# Altium PCB RF36V Beta.PcbDoc
Units mm, origin at the board's own origin, x right, y up, seen from the top; angles counter-clockwise.
Board outline 127.7 x 73.6 mm, 2 copper layers (Top Layer, Bottom Layer); 67 components, 52 nets, 206 pads, 59 vias.
Unrouted connection lines stored in the file: 6.
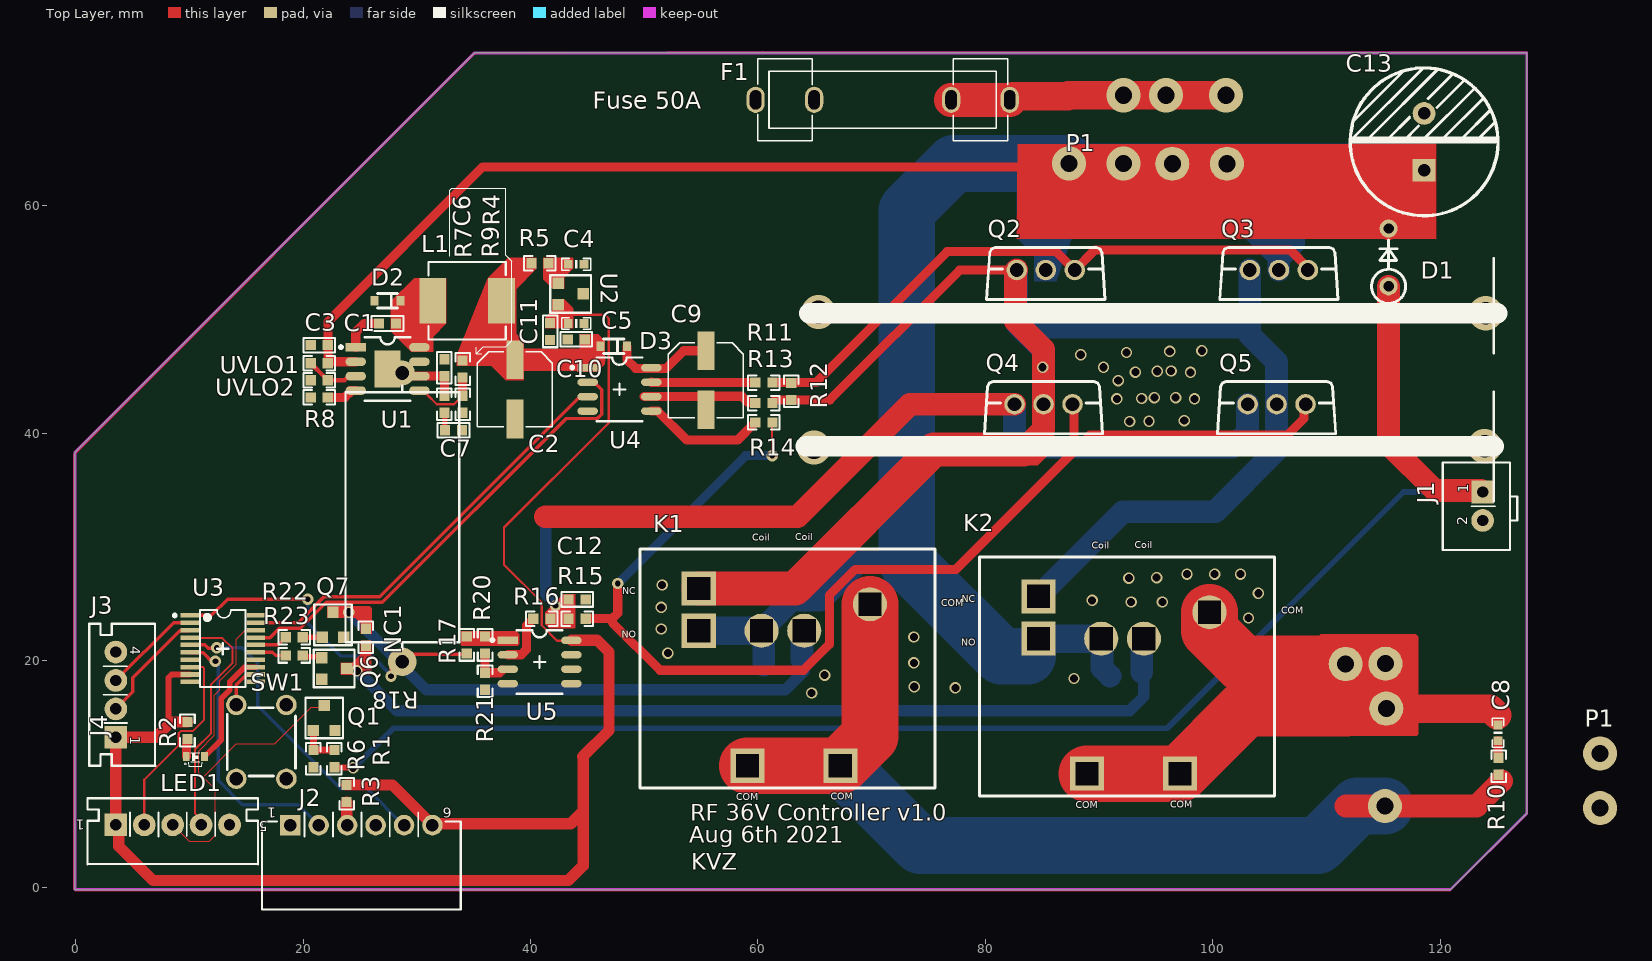
[diagram p0: Top Layer view]
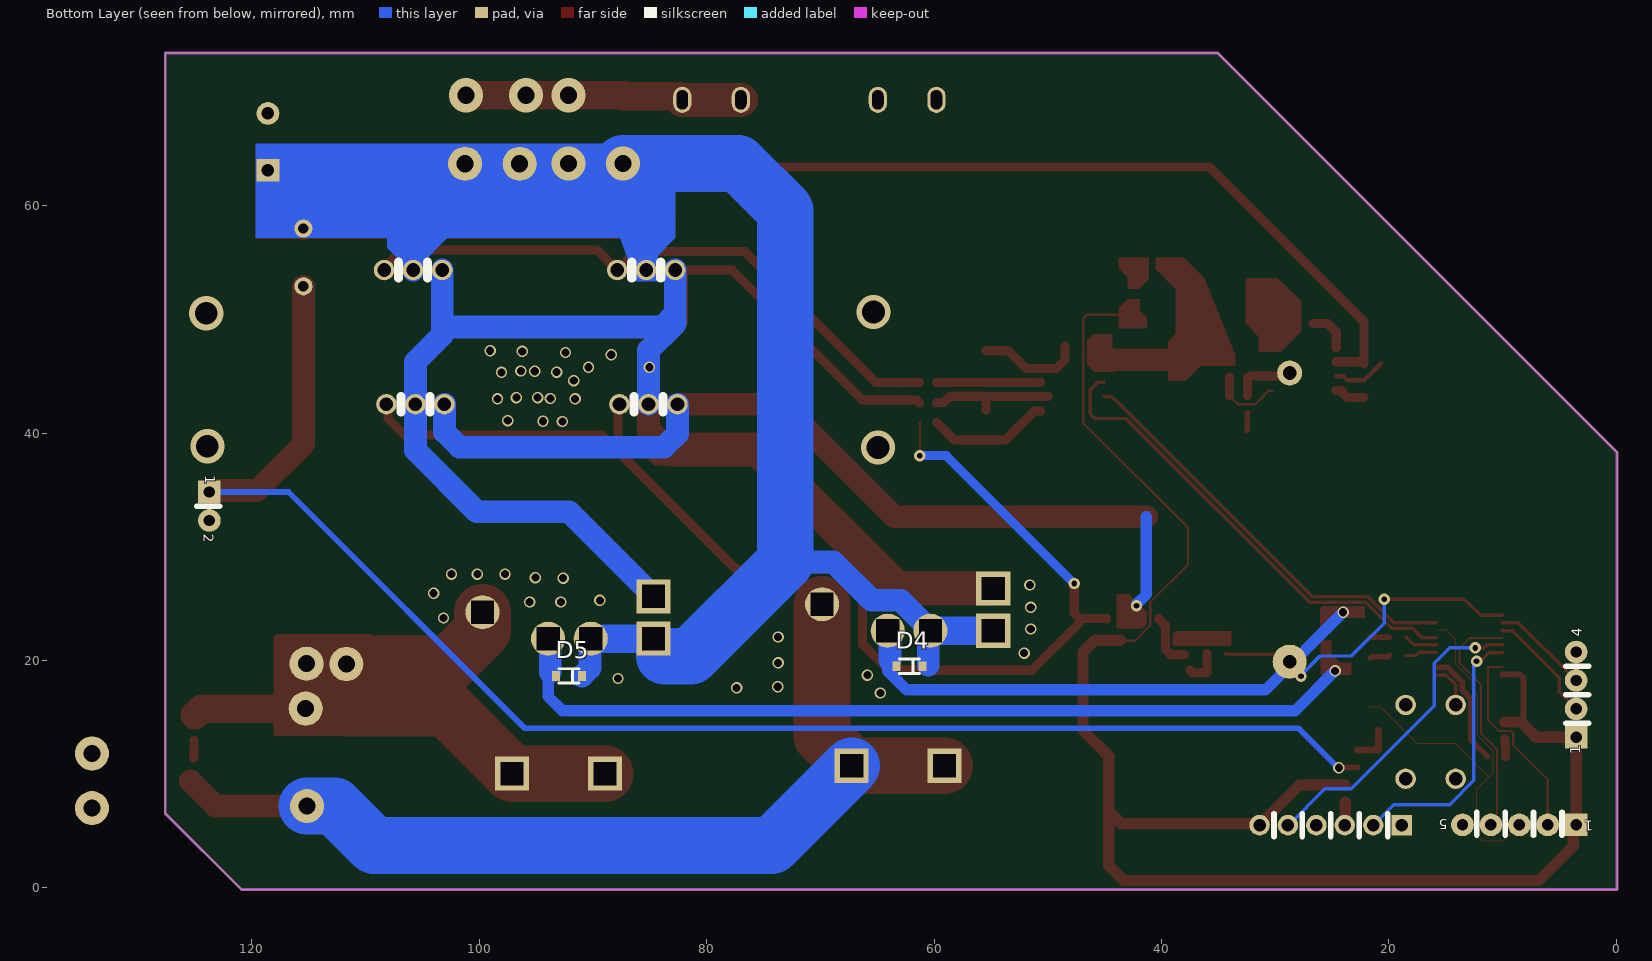
[diagram p1: Bottom Layer view, seen from below]

## Layer stack, top to bottom
Top Solder: solder mask 0.0102, Solder Resist, Dk 3.5
Top Layer: signal copper 0.0356
Dielectric 1: dielectric 0.32, FR-4, Dk 4.8
Bottom Layer: signal copper 0.0356
Bottom Solder: solder mask 0.0102, Solder Resist, Dk 3.5

## Board outline
-0.075,-0.15 120.925,-0.15 127.625,6.55 127.625,73.45 35.05,73.45 -0.075,38.325

## Design rules (kind name [scope] priority, off if disabled: settings)
Clearance [All] p1: gap=0.178 ignorepadtopadclearanceinfootprint=TRUE
PolygonConnect [All] p1: connectstyle=Direct reliefconductorwidth=0.254 reliefentries=4 polygonreliefangle="90 Angle" airgapwidth=0.254
RoutingVias [All] p1: holewidth=0.711 width=1.27 viastyle="Through Hole" minholewidth=0.711 minwidth=1.27 maxholewidth=0.711 maxwidth=1.27
SolderMaskExpansion [All] p1: expansion=0.102 istentingtop=FALSE
Width [All] p1: maxlimit=10 minlimit=0.1 preferedwidth=0.254
30 further rules are at their usual default settings.

## Classes and differential pairs
component class "Single motor monitoring Beta": C1 C2 C4 C6 C8 C10 C12 D1 D2 D4 D6 D7 J1 J2 J3 J4 K1 K2 L1 LED1 P2 Q1 Q2 Q3 Q4 Q5 Q6 Q7 R1 R2 R3 R4 R5 R6 R7 R8 R9 R10 R11 R13 R15 R17 R19 R20 R21 R22 R23 SW1 U1 U2 U3 U4 U5 UVLO1 UVLO2

## Components (designator, comment, footprint, x,y, rotation, side; value= is the part's Value field where it differs from the comment)
C1 "PXL456470-1530" CAPC0603-RW 27.425,49.65 r0 top value=0.1uF
C2 "PBE099540-1010" "CASE - D" 38.625,43.85 r90 top value=20uF
C3 "PXL456470-1530" CAPC0603-RW 21.425,47.75 r180 top value=4.7uF (schematic designator C4)
C4 "4.7uF" 0603P 44.025,54.85 r180 top (schematic designator C5)
C5 "4.7uF" 0603P 44.025,49.65 r180 top (schematic designator C6)
C6 "PXL456470-1530" CAPC0603-RW 32.425,45.75 r90 top value=68pF (schematic designator C7)
C7 "PXL456470-1530" CAPC0603-RW 33.225,40.25 r0 top value=6.8nF (schematic designator C8)
C8 "104" 0603P 125.1,13.65 r270 top (schematic designator C9)
C9 "PBE099540-1010" "CASE - D" 55.425,44.65 r90 top value=10uF (schematic designator C11)
C10 "PXL456470-1530" CAPC0603-RW 44.025,48.25 r180 top value=1uF
C11 "PXL456470-1530" CAPC0603-RW 41.725,48.95 r270 top value=4.7uF (schematic designator C12)
C12 "PXL456470-1530" CAPC0603-RW 44.1,25.375 r0 top value=102 (schematic designator C13)
C13 "PVE599570-4710" CAP_Radial_D13L25P5.0 118.6,65.625 r270 top value=1000uF (schematic designator C3)
D1 "RAD114004-0010" DO-41-V-P5.08 115.475,52.92 r90 top
D2 "42V 5A" SOD-323 27.425,51.65 r0 top
D3 "42V 5A" SOD-323 47.325,47.65 r0 top (schematic designator D4)
D4 "42V 5A" SOD-323 62.175,19.5 r180 bottom (schematic designator D6)
D5 "42V 5A" SOD-323 92.125,18.65 r180 bottom (schematic designator D7)
F1 "CFC021001-1001" "FUSE HOLDER BXSJ-01-01" 70.975,69.325 r180 top
J1 "T690300125300" "CONN 2P PH=2.5mm HAA250A-2 WHITE" 123.75,33.575 r90 top value=2.5mm
J2 "T690300121600" "CONN 6P PH=2.5mm RA XHB-6AW-KL" 25.125,5.525 r180 top value=2.5mm
J3 "CCN250000-0104" "CONN 4P PH=2.5mm B4B-XH-A" 3.525,17 r270 top value=2.5mm
J4 "CCN250000-0105" "CONN 5P PH=2.5mm B5B-XH-A" 8.525,5.55 r180 top locked value=2.5mm
K1 "SLB4119" "RELAY SLB4119" 56.025,12.55 r0 top
K2 "SLB4119" "RELAY SLB4119" 85.9,11.85 r0 top
L1 "T621000090500" "IND CSAB0740" 34.425,51.65 r0 top value=22uH
LED1 "T575013160258" "LED 0603 JH-CW52E12SMP001" 10.525,11.55 r180 top
NC1 "T501348102129" 0603-RW 25.525,22.05 r270 top
P1 "CJP012009-0050" "Motor&Bat connector" 132.9,8.975 r270 top (schematic designator P2)
P1 "CJP012009-0050" "Motor&Bat connector" 98.4,64.875 r180 top
Q1 "RCN000846-0001" SOT23-132-RW 21.85,14.95 r0 top
Q2 "RHM120060-1001" TO220-F 87.875,54.35 r180 top locked
Q3 "RHM120060-1001" TO220-F 108.375,54.35 r180 top locked
Q4 "RHM120060-1001" TO220-F 87.675,42.55 r180 top locked
Q5 "RHM120060-1001" TO220-F 108.175,42.55 r180 top locked
Q6 "RCN000846-0001" SOT23-132-RW 22.725,19.3 r270 top
Q7 "RCN000846-0001" SOT23-132-RW 22.625,23.15 r0 top
R1 "T501348102129" 0603-RW 22.75,11.375 r270 top value=22k
R2 "T501348102129" 0603-RW 9.825,13.85 r90 top value=1K
R3 "T501348102129" 0603-RW 23.825,8.3 r90 top value=101
R4 "T501348102129" 0603-RW 34.025,45.65 r270 top value=182K
R5 "T501348102129" 0603-RW 40.825,54.95 r0 top value=0ohm
R6 "T501348102129" 0603-RW 20.9,11.375 r90 top value=1k
R7 "T501348102129" 0603-RW 32.425,42.55 r270 top value=10.5K
R8 "T501348102129" 0603-RW 21.425,43.15 r0 top value=243K
R9 "T501348102129" 0603-RW 34.025,42.55 r270 top value=10.2K
R10 "T501348102129" 0603-RW 125.15,10.7 r90 top value=10R
R11 "T501348102129" 0603-RW 60.525,44.45 r0 top value=4.7R
R12 "T501348102129" 0603-RW 62.925,43.675 r90 top value=10K (schematic designator R13)
R13 "T501348102129" 0603-RW 60.525,42.65 r0 top value=4.7R (schematic designator R14)
R14 "T501348102129" 0603-RW 60.525,40.95 r0 top value=100R (schematic designator R15)
R15 "T501348102129" 0603-RW 44.1,23.675 r0 top value=10K (schematic designator R16)
R16 "T501348102129" 0603-RW 41,23.675 r0 top value=102 (schematic designator R17)
R17 "T501348102129" 0603-RW 34.4,21.375 r270 top value=1K (schematic designator R18)
R18 "QHE505000-5190" 5W-22X10-H 28.725,32.6 r90 top value=5mR (schematic designator R19)
R20 "T501348102129" 0603-RW 36,21.375 r90 top value=21K
R21 "T501348102129" 0603-RW 36,18.175 r90 top value=1K
R22 "T501348102129" 0603-RW 19.225,22.05 r0 top value=2.2k
R23 "T501348102129" 0603-RW 19.225,20.45 r0 top value=2.2k
SW1 "MSWA06012-0010" TS_6X6X8_DIP 16.325,12.85 r90 top value=TACT
U1 "TPS54540" SO8-EP 27.425,45.65 r0 top
U2 "7805" 2SC2712GR 43.525,52.25 r270 top
U3 "RCI800336-0001" TSSOP20 12.925,21.05 r270 top
U4 "T610900027257" SO8 47.825,43.85 r0 top
U5 "RCI000358-0001" SO8 40.8,19.875 r0 top
UVLO1 "T501348102129" 0603-RW 21.425,46.15 r0 top value=1.676M
UVLO2 "T501348102129" 0603-RW 21.425,44.65 r0 top value=60K

## Footprints (in the part's own frame and the unit in brackets; to place one, negate y for a bottom-side part, rotate by r counter-clockwise, add the part's x,y. Pads: shape width x height; smd on the part's side, far side on the other; paste and mask are expansions set on the pad)
2SC2712GR [mm] "SOT23 -231  (SC-59 SST3)"
  rect 1x1 smd: 1(0.95,-1.1) 2(-0.95,-1.1) 3(0,1.1)
  silkscreen extent -1.65,-1.79 1.65,1.79, body extent -1.46,-1.17 1.46,1.17, height 1
5W-22X10-H [mm] "Resistor,Axial,5W 25.4mm C X 1.2 W 22mm LX10mm"
  round 2.5 / inner round 2.2 / far side round 3 hole 1.2 mask+0.05: 1(-12.7,0)
  round 2.2 hole 1.2 mask+0.05: 2(12.7,0)
  silkscreen extent -11.58,-5 11.58,5, body extent -13.19,-4.8 13.21,4.9, height 9.71
0603-RW [mm]
  rect 0.9x0.9 smd mask+0.05: 1(-0.75,0) 2(0.75,0)
  silkscreen extent -1.39,-0.64 1.39,0.64, body extent -0.8,-0.41 0.8,0.39, height 0.3
0603P [mil]
  rect 30x30 smd: 1(-27,0) 2(27.5,-0.06)
  silkscreen extent -50,-20 50,20
CAP_Radial_D13L25P5.0 [mm] "Body: Dia. 14mm(Max,),Height:26.5mm(max),Pitch:5mm"
  rect 2x2 hole 1.1 mask+0.05: 1(2.5,0)
  round 2 hole 1.1 mask+0.05: 2(-2.5,0)
  silkscreen extent -6.5,-6.5 6.5,6.5, body extent -6.5,-6.49 6.5,6.49, height 25
CAPC0603-RW [mm] "Body size:  L1.6XW0.8XT0.8mm"
  rect 0.9x0.9 smd mask+0.05: 1(-0.75,0) 2(0.75,0)
  silkscreen extent -1.39,-0.64 1.39,0.64, body extent -0.8,-0.4 0.8,0.4, height 0.8
"CASE - D" [mm] "CHIP ELECT CAP D6.3mm * H5.4mm"
  rect 3.4x1.5 smd mask+0.05: 1(2.6,0) 2(-2.6,0)
  silkscreen extent -3.3,-3.3 3.3,3.3, body extent -3.5,-3.3 3.5,3.3, height 5.4
"CONN 2P PH=2.5mm HAA250A-2 WHITE" [mm] "CONN 2P PH=2.5mm HAA250A-2 WHITE"
  rect 2x2 hole 1: 1(1.25,0)
  round 2 hole 1: 2(-1.25,0)
  silkscreen extent -3.85,-3.05 3.85,3.5, body extent -3.75,-3.05 3.75,3.5, height 7.4
"CONN 4P PH=2.5mm B4B-XH-A" [mm] "CONN 4P PH=2.5mm B4B-XH-A H7mm"
  rect 2x2 hole 1: 1(3.75,0)
  round 2 hole 1: 2(1.25,0) 3(-1.25,0) 4(-3.75,0)
  silkscreen extent -6.25,-2.35 6.25,3.46, body extent -6.2,-2.3 6.2,3.45, height 7
"CONN 5P PH=2.5mm B5B-XH-A" [mm] "CONN 5P PH=2.5mm B5B-XH-A H7mm"
  rect 2x2 hole 1: 1(5,0)
  round 2 hole 1: 2(2.5,0) 3(0,0) 4(-2.5,0) 5(-5,0)
  silkscreen extent -7.5,-2.35 7.5,3.47, body extent -7.45,-2.35 7.45,3.4, height 7
"CONN 6P PH=2.5mm RA XHB-6AW-KL" [mm] "WAFER 6P XHB-6AW-KL"
  rect 1.8x1.8 hole 1.1: 1(6.25,0)
  round 1.8 hole 1.1: 2(3.75,0) 3(1.25,0) 4(-1.25,0) 5(-3.75,0) 6(-6.25,0)
  silkscreen extent -8.75,-1.11 8.75,7.43, body extent -8.75,-0.31 8.75,7.42, height 6.56
DO-41-V-P5.08 [mm]
  round 1.6 hole 0.91: 1(0,0) 2(5.08,0)
  silkscreen extent -1.5,-1.5 4.06,1.5, body extent -1.42,-1.4 5.53,1.4, height 7.45
"FUSE HOLDER BXSJ-01-01" [mm] "FUSE HOLDER 5*20MM BXSJ-01-01"
  oval 1.6x2.3 hole 1 slot 1.7 at 90 deg: 1(-11.175,0) 1(-6.025,0) 2(6.025,0) 2(11.175,0)
  silkscreen extent -11,-3.6 11,3.6, body extent -11.41,-3.88 11.39,3.83, height 11.42
"IND CSAB0740" [mm] "6.6mmX6.6mm H3.8mm"
  rect 2.35x4 smd: 1(-3.025,0) 2(3.025,0)
  silkscreen extent -3.4,-3.4 3.4,3.4, body extent -3.5,-3.4 3.5,3.4, height 3.8
"LED 0603 JH-CW52E12SMP001" [mm]
  rect 0.6x0.8 smd mask+0.03: 1(-0.8,0) 2(0.8,0)
  silkscreen extent -0.6,-0.35 0.97,0.85, body extent -0.8,-0.35 0.8,0.85, height 0.6
"Motor&Bat connector" [mm]
  round 3 hole 1.5: 1(-2.85,1.175) 2(1.95,1.175)
"RELAY SLB4119" [mm] "HFD23\012-1ZS"
  rect 3x3 hole 2 square mask+0.05: 1(-1.225,10.075) 2(-1.225,13.8) 6(11.225,-1.8) 7(3.05,-1.8)
  round 3 hole 2 square mask+0.05: 3(4.3,10.075) 4(8.05,10.075) 5(13.825,12.4)
  silkscreen extent -6.4,-3.75 19.55,17.25, body extent -6.43,-3.75 19.5,17.25, height 0.25
SO8 [mm] "SO8 8Pin Pitch 1.27mm Body 4.9mm X 3.9mm"
  rect 1.8x0.65 smd: 1(-2.8,1.905)
  oval 1.8x0.65 smd: 2(-2.8,0.635) 3(-2.8,-0.635) 4(-2.8,-1.905) 5(2.8,-1.905) 6(2.8,-0.635) 7(2.8,0.635) 8(2.8,1.905)
  silkscreen extent -4.25,-2.8 2,2.8, body extent -3,-2.45 3,2.45, height 1.75
SO8-EP [mm] "SO8 8Pin Exposed Pad, Pitch 1.27mm Body 4.9mm X 3.9mm"
  rect 2.3x3.25 smd: 0(0,0)
  rect 1.8x0.75 smd: 1(-2.8,1.905)
  oval 1.8x0.75 smd: 2(-2.8,0.635) 3(-2.8,-0.635) 4(-2.8,-1.905) 5(2.8,-1.905) 6(2.8,-0.635) 7(2.8,0.635) 8(2.8,1.905)
  silkscreen extent -4.2,-2.8 2,2.8, body extent -3,-2.45 3,2.45, height 1.75
SOD-323 [mm] "SMD Body W 1.4mm L 1.8mm"
  rect 0.7x0.85 smd: 1(-1.15,0) 2(1.15,0)
  silkscreen extent -0.89,-0.64 0.89,0.64, body extent -1.3,-0.67 1.3,0.68, height 1.1
SOT23-132-RW [mm]
  rect 1x1 smd: 1(-0.95,-1.1) 2(0.95,-1.1) 3(0,1.1)
  silkscreen extent -1.65,-1.79 1.65,1.79, body extent -1.46,-1.17 1.46,1.17, height 1
TO220-F [mm]
  round 1.8 hole 1.2: 1(0,0) 2(2.55,0) 3(5.1,0)
  silkscreen extent -2.65,-2 7.75,2.6, body extent -2.53,-1.76 7.63,3.04, height 21.3
TS_6X6X8_DIP [mm] "TACT Switch DIP Body  L6*W6*H8mm"
  round 1.8 hole 1.2 mask+0.05: 1(-3.25,2.2) 2(3.25,2.2) 3(-3.25,-2.2) 4(3.25,-2.2)
  silkscreen extent -3,-3 3,3, body extent -3.98,-3.1 3.94,3.1, height 8
TSSOP20 [mm] "TSSOP,Exposed Paddle,0.65mm,pitch;20 pin,4.60mm W X 6.6mm L X 1.20mm H body"
  rect 0.4x1.6 smd: 1(-2.925,-2.9) 2(-2.275,-2.9) 3(-1.625,-2.9) 4(-0.975,-2.9) 5(-0.325,-2.9) 6(0.325,-2.9) 7(0.975,-2.9) 8(1.625,-2.9) 9(2.275,-2.9) 10(2.925,-2.9) 11(2.925,2.9) 12(2.275,2.9) 13(1.625,2.9) 14(0.975,2.9) 15(0.325,2.9) 16(-0.325,2.9) 17(-0.975,2.9) 18(-1.625,2.9) 19(-2.275,2.9) 20(-2.925,2.9)
  silkscreen extent -3.4,-4.32 3.37,2, body extent -3.25,-3.2 3.25,3.2, height 1.1

## Part data
C1: library part "CAP0603 0.015uF 50V 10%", "GP CHIP CAP 0.015uF 50V 10% 0603 TYPE X7R", PACKAGE=CAPC0603, Tolerance=10%, Voltage=10V, Customer Specific=N/A, DIP&SMD=SMD, Other=X7R, SAP=T542021537508, Type=Capacitor, Vendor Code=10010262, Vendor Name=东莞市晴远电子有限公司
C2: library part "CAP E 100uF 16V 20% SMD", "CHIP ELECT 100uF 16V 20% SMD 6.3x5.4mm", PACKAGE="CASE - D", Tolerance=20%, Voltage=16V, Customer Specific=N/A, DIP&SMD=SMD, SAP=T551101434030, Type=Capacitor, Vendor Code=10020343, Vendor Name=深圳市春明电子有限公司
C3: library part "CAP0603 0.015uF 50V 10%", "GP CHIP CAP 0.015uF 50V 10% 0603 TYPE X7R", PACKAGE=CAPC0603, Tolerance=10%, Voltage=50V, Customer Specific=N/A, DIP&SMD=SMD, Other=X7R, SAP=T542021537508, Type=Capacitor, Vendor Code=10010262, Vendor Name=东莞市晴远电子有限公司
C4 C5 C8: library part C
C6 C7: library part "CAP0603 0.015uF 50V 10%", "GP CHIP CAP 0.015uF 50V 10% 0603 TYPE X7R", PACKAGE=CAPC0603, Tolerance=10%, Voltage=3V, Customer Specific=N/A, DIP&SMD=SMD, Other=X7R, SAP=T542021537508, Type=Capacitor, Vendor Code=10010262, Vendor Name=东莞市晴远电子有限公司
C9: library part "CAP E 100uF 16V 20% SMD", "CHIP ELECT 100uF 16V 20% SMD 6.3x5.4mm", PACKAGE="CASE - D", Tolerance=20%, Voltage=6V, Customer Specific=N/A, DIP&SMD=SMD, SAP=T551101434030, Type=Capacitor, Vendor Code=10020343, Vendor Name=深圳市春明电子有限公司
C10: library part "CAP0603 0.015uF 50V 10%", "GP CHIP CAP 0.015uF 50V 10% 0603 TYPE X7R", PACKAGE=CAPC0603, Tolerance=10%, Voltage=16V, Customer Specific=N/A, DIP&SMD=SMD, Other=X7R, SAP=T542021537508, Type=Capacitor, Vendor Code=10010262, Vendor Name=东莞市晴远电子有限公司
C11 C12: library part "CAP0603 0.015uF 50V 10%", "GP CHIP CAP 0.015uF 50V 10% 0603 TYPE X7R", PACKAGE=CAPC0603, Tolerance=10%, Voltage=6V, Customer Specific=N/A, DIP&SMD=SMD, Other=X7R, SAP=T542021537508, Type=Capacitor, Vendor Code=10010262, Vendor Name=东莞市晴远电子有限公司
C13: library part "CAP E Aluminum 470uF 50V 20% - PVE599570-4710", "COND ELECT 470uF 50V 20% 105 13x25mm", PACKAGE=470uF/50V, Tolerance=20%, Voltage=50V, Customer Specific=N/A, DIP&SMD=DIP, MFG=佳维诚, SAP=T552471464020, Type=Capacitor, Vendor Code=10020154, Vendor Name=惠州市佳维诚电子有限公司
D1: library part 1N4004S, "GP DIODE  1N4004 1A 280VRMS DO-41", Current=1A, PACKAGE=DO-41, Voltage=400V, Customer Specific=N/A, DIP&SMD=DIP, MFG=PANJIT, MFG Part=1N5401, SAP=T571002250423, Type=DIODE, Vendor Code=10020343, Vendor Name=深圳市春明电子有限公司
D2 D3 D4 D5: library part SD107WS, "Schottky Diodes , SOD-323", PACKAGE=SOD-323, CREATE_NAME=Nathan, CREATE_TIME=17-Nov-2020, Customer Specific=N/A, DIP&SMD=SMD, MFG="Micro Commercial Components", MFG Part=SD107WS, Type=DIODE
F1: library part "FUSE HOLDER BXSJ-01-01", "FUSE HOLDER 5*20MM BXSJ-01-01", CREATE_NAME=GordonL@Deftronics, CREATE_TIME=25-JAN-2013, DIP&SMD=DIP, MFG=亿山, MFG Part=50A, SAP=T690300023400, Type=Connector
J1: library part "CONN 2P PH=2.5mm HAA250A-2 BLACK", "CONNECTOR HA2.5 2PIN BLACK K", Current=3A, CREATE_NAME=Nathan, CREATE_TIME=24-Nov-2017, DIP&SMD=DIP, MFG=金瑞康, MFG Part="HAA250A-2 BLACK", SAP=T690300125300, Type=Connector
J2: library part "CONN PH 6P PH=2.5mm RA XHB-6AW-KL", "CONNECTOR 6PIN P=2.5 WHITE 90 K", CREATE_NAME=Nathan, CREATE_TIME=27-Sep-2017, DIP&SMD=DIP, MFG=金佳电子, MFG Part=XHB-6AW-KL, SAP=T690300121600, Type=Connector
J3: library part "CONN 4P PH=2.5mm B4B-XH-A", "GP CONNECTOR B4B-XH-A 4 PIN", Current=3A, DIP&SMD=DIP, SAP=T690300029000, Type=Connector, Vendor Code=10009989, Vendor Name=亿源电子有限公司
J4: library part "CONN 5P PH=2.5mm B5B-XH-A", "CONNECTOR B5B-XH-A 5 PIN", Current=3A, DIP&SMD=DIP, SAP=T690300029100, Type=Connector, Vendor Code=10020373, Vendor Name=深圳市利民丰电子有限公司
K1 K2: library part "Relay SLB4119 7P"
L1: library part "IND 22uH CSAB0740-220M", "22UH 4A 100K SMD CODACA CSAB074 K", Current=4A, Tolerance=20%, CREATE_NAME=Nathan, CREATE_TIME=30-Aug-2019, Customer Specific=N/A, DCR="125 mohm (max.)", DIP&SMD=SMD, MFG=CODACA, MFG Part=CSAB0740-220M, SAP=T621000090500, Type=INDUCTOR
LED1: library part "LED 0603 JH-CW52E12SMP001", "LED W WHI 0602 JH-CW52E12SM MINGSHOU L", Color=White, PACKAGE=0603, CREATE_NAME=Tom, DIP&SMD=SMD, MFG=MINGSHOU, MFG Part=JH-CW52E12SMP001, SAP=T575013160258, Type=LED
NC1: library part "RES0603 1/16W 0.1% 3.48K OHM", "CHIP 3.48K OHM 50PPM +-0.1% 0603 WALS L", Power="1/16 W", CREATE_NAME=Tom, CREATE_TIME=12-Apr-2016, Customer Specific=N/A, DIP&SMD=SMD, MFG=WALSIN, MFG Part=WF06T3481BTL, SAP=T501348102129, TOL=0.1%, Type=Resistor
P1 P1: library part "AC INLET 2P DB8-6S1 N-Polar", "AC SOCKET 2P D2.36 2.5A 250V VDE BLACK", Current=5A, DIP&SMD=DIP, MFG=金明浩, MFG Part="DB8-6S1 N-Polar", SAP=T690300011500, Type=Connector, Vendor Code=10010007, Vendor Name=深圳市金明浩电子科技有限公司
Q1 Q6 Q7: library part LBC846BLT1G, "NPN LRC BC846BLT1G SOT23", PACKAGE=SOT-23, Customer Specific=N/A, DIP&SMD=SMD, MFG=LRC, MFG Part=2N5551, SAP=T581003640437, Type=NPN, Vendor Code=10009129, Vendor Name="WING HING ENTERPRISE CO"
Q2 Q3 Q4 Q5: library part 12N60L-A-TF3-T, "MOSFET 3PIN 12N60L-A -TF3-T TO-220F", Current=12A, PACKAGE=TO220, Voltage=600V, Customer Specific=N/A, DIP&SMD=DIP, MFG=UTC, MFG Part=12N60L-A-TF3-T, SAP=T586002570924, Type=MOSFET, Vendor Code=10020223, Vendor Name=丰富利科技（深圳）有限公司
R1 R2 R3 R4 R5 R6 R7 R8 R9 R10 R11 R12 R13 R14 R15 R16 R17 R20 R21 R22 R23 UVLO1 UVLO2: library part "RES0603 1/16W 0.1% 3.48K OHM", "CHIP 3.48K OHM 50PPM +-0.1% 0603 WALS L", PACKAGE=0603, Power="1/16 W", CREATE_NAME=Tom, CREATE_TIME=12-Apr-2016, Customer Specific=N/A, DIP&SMD=SMD, MFG=WALSIN, MFG Part=WF06T3481BTL, SAP=T501348102129, TOL=0.1%, Type=Resistor
R18: library part "RES 5W 5% 5.1 OHM W10D9.5L22H22 QHE-5190", "CEMENT RESISTOR 5.1OHM 5W 5% AXIAL", PACKAGE=5W, Power=2W, Customer Specific=N/A, DIP&SMD=DIP, MFG=Xingdacheng, MFG Part="RES 5W 5% 5.1 OHM W10D9.5L22H22 QHE", SAP=T710600010200, TOL=5%, Type=Resistor, Vendor Code=10008495, Vendor Name=深圳市兴达诚电子有限公司
SW1: library part "TACT SW H8.0 DIP", "TACT SWITC 4P L6*W6*H8mm", DIP&SMD=DIP, Force=250gf, MFG="ShenZhen GanHad", MFG Part=TS-06V-8HM, SAP=T670200001500, Type=Switch
U1: "4.5-42V input 5A output"
U3: library part N76E003, "IC MCU 20P TSSOP20", CREATE_NAME=GordonL@Deftronics, CREATE_TIME=23-Mar-2014, Customer Specific=N/A, DIP&SMD=SMD, MFG=ST, MFG Part=STM8S003F3P6, SAP=T610300083725, Type=IC
U4: library part 2ED2106S06F, "DRIVER 2ED2106S06F DSO-8 INFINEO K", CREATE_NAME=Nathan, CREATE_TIME=14-Apr-2020, Customer Specific=N/A, DIP&SMD=SMD, MFG=Infineon, MFG Part=EG2106, SAP=T610900027257, Type=IC
U5: library part LM358AM, "IC OP-AMP Dual LM358 DUAL OP-AMP SOIC8", Customer Specific=N/A, DIP&SMD=SMD, MFG="National SEMI", MFG Part=LM358AM, SAP=T610500008001, Type="IC AMP", Vendor Code=10020355, Vendor Name="SERIAL MICROELECTRONICS (HK) LIMITE"

## Free pads (board coordinates)
  round 3 hole 1.5: 1(111.7,19.7) 1(115.155,7.2) 1(115.2,19.725) 1(115.274,15.779)

## Via types
v1: diameter 1, hole 0.711, Top Layer to Bottom Layer, tented both sides, 39 vias
v2: diameter 1, hole 0.5, Top Layer to Bottom Layer, 7 vias
v3: diameter 3, hole 1.5, Top Layer to Bottom Layer, 5 vias
v4: diameter 3, hole 2, Top Layer to Bottom Layer, 4 vias
v5: diameter 1, hole 0.711, Top Layer to Bottom Layer, 3 vias
v6: diameter 1/1 (per signal layer), hole 0.711, Top Layer to Bottom Layer, tented both sides, 1 vias

## Nets (pads, with @x,y where several pads share a name; then routed paths per layer and width w, separated by ;. In a path a pad name is that pad's centre, name@x,y a point inside that pad or via, vN(x,y) a via of type N, cw(c..) or ccw(c..) an arc to the next point about the centre after c; other vN are vias at no path point)
15V: C2.1 C10.1 D3.1 L1.2 R4.1 R5.1 U4.1 | length 7
  Top Layer w2: C2.1 45.525,46.45 45.6,46.525
A_SEN: R17.2 U3.1 | length 30.9
  Top Layer w0.3: U3.1 11.925,23.975 13.35,25.4 v2(20.4,25.4) ; v2(27.725,18.625) 27.725,20.374 27.901,20.55 34.325,20.55 R17.2
  Bottom Layer w0.3: v2(20.4,25.4) 20.4,23.3 23.3,20.4 26.057,20.4 27.725,18.731 v2(27.725,18.625)
B: D5.1 K2.4 NC1.2 Q6.3 | length 79.3
  Bottom Layer w1: v5(24.725,19.1) 28.225,15.6 92.714,15.6 93.95,16.836 K2.4
  Bottom Layer w2: 93.759,18.984 93.759,21.734 K2.4
BW: R23.1 U3.15 | length 2.8
  Top Layer w0.3: U3.15 17.3,20.725 17.575,20.45 R23.1
Err_IDC: LED1.1 U3.13 | length 10.3
  Top Layer w0.5: LED1.1 12.8,13.025 12.8,15.547 12.797,15.55 12.797,16.65 12.8,16.653 12.8,16.675 13.547,17.422 13.547,18.128 14.822,19.403 15.803,19.403 U3.13
F: D4.1 K1.4 NC1.1 Q7.3 | length 49.7
  Bottom Layer w1: v5(24.025,24.25) 30.85,17.425 62.4,17.425 64.075,19.1 K1.4
  Bottom Layer w2: 63.884,20.059 63.884,22.434 K1.4
FW: R22.1 U3.16 | length 2.9
  Top Layer w0.3: U3.16 17.8,21.375 R22.1
GND: C2.2 C3.2 C4.1 C5.1 C6.2 C7.2 C10.2 C11.2 C12.2 C13.2 D2.1 F1.2 J1.2 J2.1 J2.4 J3.4 J4.5 Q1.2 Q6.2 Q7.2 R6.1 R8.1 R9.2 R18.1 R21.1 SW1.4 U1.0 U1.7 U2.3 U3.7 U4.4 U5.4 UVLO2.1
  other v1: 64.725,17.15 77.375,17.6 73.75,17.7 87.8,18.425 65.875,18.725 73.725,19.8 52.075,20.65 73.725,22.075 51.5,22.775 103.15,23.75 51.5,24.675 92.825,25.15 95.575,25.15 89.4,25.3 104.025,25.925 51.575,26.65 92.625,27.25 95.075,27.3 97.75,27.6 100.175,27.6 102.45,27.6 92.7,41.025 94.4,41.05 97.5,41.1 91.575,43.025 98.4,43.025 93.75,43.05 94.875,43.125 96.75,43.125 91.7,44.625 98.05,45.35 93.2,45.375 95.125,45.45 96.35,45.475 90.4,45.8 88.4,46.9 92.425,47.1 99.05,47.25
  other v6: 96.225,47.2
H/L/BRK: J2.5 U3.5 | length 27.6
  Top Layer w0.3: U3.5 11.361,21.375 11.661,21.075 12.366,21.075 v2(12.404,21.113)
  Bottom Layer w0.3: v2(12.404,21.113) 14.662,21.113 16,19.775 16,16.025 23.3,8.725 25.625,8.725 28.825,5.525 J2.5
Hall: J2.2 U3.6 | length 23.7
  Top Layer w0.3: U3.6 10.075,20.675 11.2,20.675 11.985,19.89 12.233,19.89 v2(12.284,19.941)
  Bottom Layer w0.3: v2(12.284,19.941) 12.525,19.7 12.525,9.464 14.663,7.326 19.574,7.326 J2.2
HI: U3.17 U4.2 | length 42.2
  Top Layer w0.3: U3.17 17.086,22.025 17.909,22.847 19.759,22.847 22.034,25.122 26.972,25.122 43.142,41.292 45.87,41.292 46.253,41.675 46.253,43.832 45.6,44.485 U4.2
HO: R11.1 U4.7 | length 9.2
  Top Layer w0.8: U4.7 50.643,44.467 59.758,44.467 R11.1
LI: U3.19 U4.3 | length 37.4
  Top Layer w0.3: U3.19 19.561,23.325 21.836,25.6 26.725,25.6 44.165,43.04 44.18,43.04 44.355,43.215 U4.3
LO: R14.1 U4.5 | length 10.8
  Top Layer w0.8: U4.5 51.205,41.945 53.75,39.4 58.225,39.4 R14.1
MOS_DET: U3.20
NetC1_1: C1.1 U1.1 | length 3.7
  Top Layer w0.8: U1.1 24.625,48.9 25.375,49.65 C1.1
NetC1_2: C1.2 D2.2 L1.1 U1.8
NetC4_2: C4.2 R5.2 U2.2
NetC6_1: C6.1 R7.1 U1.6 | length 4.5
  Top Layer w0.8: U1.6@29.55,45.015 32.21,45.015 32.275,44.95 32.375,44.95 32.425,44.9 R7.1
NetC7_1: C7.1 R7.2 | length 1.6
  Top Layer w0.5: R7.2 32.45,41.775 32.45,40.275 C7.1
NetC8_1: C8.1 K2.5 K2.6 K2.7 P1.1@134.075,11.825 pad.1@111.7,19.7 pad.1@115.2,19.725 pad.1@115.274,15.779 | length 65.1
  Top Layer w2.5: pad.1@115.274,15.779 124.421,15.779 125.025,15.175 ; pad.1@111.7,19.7 111.713,19.687 111.713,15.813 111.725,15.8 115.274,15.8 115.237,15.838 115.237,19.841 115.185,19.789 111.789,19.789 pad.1@111.7,19.7
  Top Layer w5: K2.7 K2.6 102.875,15.8 111.725,15.8 ; K2.5 99.725,22.629 102.654,19.7 pad.1@111.7,19.7
NetC8_2: C8.2 R10.2 | length 1.5
  Top Layer w0.8: C8.2 C8.2 125.1,11.5 R10.2
NetC9_1: C9.1 D3.2 U4.8 | length 9.1
  Top Layer w0.8: D3.2 48.475,46.475 49.25,45.7 51.925,45.7 53.475,47.25 C9.1
NetC9_2: C9.2 R13.1 U4.6 | length 11
  Top Layer w0.8: U4.6@50,43.215 U4.6 C9.2@55.425,43.215 ; C9.2 55.425,42.9 55.775,43.25 58.584,43.25 59.134,42.7 59.725,42.7 R13.1
NetC12_1: C12.1 Q4.3 Q5.3 R15.1 R16.2 R18.2 | length 80.1
  Top Layer w2: 41.325,32.65 63.475,32.65 73.375,42.55 Q4.3
  Bottom Layer w1: 41.325,32.65 41.325,25.825 42.2,24.95 v2(42.2,24.825)
  Bottom Layer w2: Q4.3 82.575,39.947 83.747,38.775 101.75,38.775 103.075,40.1 Q5.3
NetD1_1: D1.1 J1.1 R1.2 | length 134.8
  Top Layer w0.5: R1.2 22.775,10.6 24.375,10.6 v5(24.4,10.575)
  Top Layer w2: D1.1 115.475,39.025 119.55,34.95 J1.1@123.625,34.95
  Bottom Layer w0.5: v5(24.4,10.575) 24.475,10.575 27.95,14.05 96,14.05 116.775,34.825 J1.1
NetF1_1: F1.1 | length 24.3
  Top Layer w2.5: F1.1@82.15,69.325 82.454,69.629 87.254,69.629 87.35,69.725 v3(92.175,69.725) v3(95.9,69.725) v3(101.175,69.725)
  Top Layer w3: F1.1@77,69.325 F1.1@82.15,69.325
NetJ2_3: J2.3 R3.1 | length 2
  Top Layer w1: R3.1 23.825,5.575 J2.3
NetK1_2: K1.2 K2.2 Q2.3 Q3.3 Q4.2 Q5.2 R12.1 R13.2 | length 154.4
  Top Layer w0.8: R13.2 61.55,42.925 R12.1 66.325,42.925 77.75,54.35 Q2.3
  Top Layer w2: Q2.3 82.65,54.225 82.65,49.85 85.125,47.375 Q4.2 85.125,40.357 83.343,38.575
  Top Layer w3: K1.2 63.275,26.35 75.5,38.575 83.343,38.575
  Bottom Layer w2: Q2.3 82.775,50.522 ; K2.2 92.125,33.1 100.225,33.1 105.625,38.5 Q5.2 105.625,46.275 103.275,48.625 Q3.3 ; Q4.2 85.125,47.275 82.775,49.625 82.775,50.522 ; 103.275,49.35 83.947,49.35 82.775,50.522
  other v1: 85.05,45.8
NetK1_5: K1.5 K1.6 K1.7 P1.2@134.075,7.025 pad.1@115.155,7.2 R10.1 | length 90.3
  Top Layer w2: 111.725,7.2 115.155,7.2 123.2,7.2 125.4,9.4
  Top Layer w5: K1.7 K1.6 69.85,13.35 K1.5
  Bottom Layer w5: K1.6 74.275,3.725 109.25,3.725 112.725,7.2 pad.1@115.155,7.2
NetLED1_2: LED1.2 R2.1 | length 1.6
  Top Layer w0.8: LED1.2 9.725,12.666 9.775,12.716 9.775,13.05 R2.1
NetQ1_1: Q1.1 R1.1 R6.2 | length 3.6
  Top Layer w0.6: Q1.1 R6.2 R1.1
NetQ2_1: Q2.1 Q3.1 R11.2 R12.2 | length 54.4
  Top Layer w0.8: R11.2 62.9,44.45 R12.2 62.975,44.475 65.15,44.475 76.647,55.972 86.253,55.972 Q2.1 89.65,56.125 106.806,56.125 108.375,54.556 Q3.1
  Top Layer w1: Q3.1@108.159,54.35 Q3.1
NetQ4_1: Q4.1 Q5.1 R14.2 R15.2 | length 106.8
  Top Layer w0.2: v2(61.25,38.025) 61.25,40.925 R14.2
  Top Layer w0.8: R15.2 44.875,23.7 47.206,23.7 ; v2(47.675,26.775) 47.675,24.169 47.206,23.7 ; Q4.1 87.81,42.415 87.81,38.715 87.963,38.562 ; Q5.1 108.053,42.428 108.053,41.303 106.575,39.825 89.225,39.825 87.963,38.562 ; 47.206,23.7 47.206,23.344 51.4,19.15 64,19.15 66.288,21.438 66.288,25.74 68.575,28.028 77.428,28.028 87.963,38.562
  Bottom Layer w0.8: v2(47.675,26.775) 58.925,38.025 v2(61.25,38.025)
NetQ6_1: Q6.1 R23.2 | length 1.7
  Top Layer w0.5: R23.2 20.075,20.35 21.525,20.35 Q6.1
NetQ7_1: Q7.1 R22.2 | length 1.7
  Top Layer w0.5: R22.2 Q7.1
NetR4_2: R4.2 R9.1 U1.5 | length 6.2
  Top Layer w0.2: U1.5 30.601,43.745 30.93,43.416 30.93,43.37 31.75,42.55 33.275,42.55 R9.1
  Top Layer w0.8: R9.1 R4.2
NetR8_2: R8.2 U1.4 | length 2.8
  Top Layer w0.8: R8.2 23.656,43.15 24.125,43.619 24.125,43.72 24.15,43.745 U1.4
NetR16_1: R16.1 U5.2 | length 4.8
  Top Layer w0.8: U5.2 39.181,20.51 39.65,20.979 39.65,23.075 R16.1
NetR17_1: R17.1 R20.2 U5.1
NetR20_1: R20.1 R21.2 U5.3 | length 3.3
  Top Layer w0.8: R20.1 R21.2 37.26,18.925 U5.3@37.5,19.165
NetU1_3: U1.3 UVLO1.1 UVLO2.2 | length 4.7
  Top Layer w0.4: UVLO1.1 21.925,44.9 UVLO2.2 23.64,44.65 24.005,45.015 U1.3
OCP/TX: J3.3 U3.2 | length 8.6
  Top Layer w0.3: J3.3 8.6,23.325 U3.2
PLC: U3.11
RST: J4.4 U3.4 | length 21.3
  Top Layer w0.178: U3.4 10.075,21.975 12.9,21.975 13.8,21.075 13.8,19.8 11.875,17.875 11.875,13.57 10.481,12.176 10.481,6.585 11.025,6.04 J4.4
RX: J3.2 U3.3 | length 10.1
  Top Layer w0.3: J3.2 5.025,17.25 5.025,18.489 9.161,22.625 9.975,22.625 U3.3
SCL: J4.3 Q1.3 U3.18 | length 39.1
  Top Layer w0.1: J4.3 9.975,4.1 11.725,4.1 12.253,4.628 12.253,8.672 11.2,9.725 ; U3.18 14.925,22.675 14.117,21.867 14.117,19.669 12.675,18.227 12.675,17.425 12.192,16.942 12.192,13.439 10.797,12.044 10.797,10.128 11.2,9.725 ; Q1.3 21.7,15.9 20.725,15.9 17.487,12.662 14.137,12.662 11.2,9.725
SDA: J4.2 U3.8 | length 17.9
  Top Layer w0.178: J4.2 6.025,9.523 9.058,12.556 9.058,13.61 9.265,13.817 10.319,13.817 11.3,14.798 11.3,19.321 11.196,19.425 U3.8
SW: SW1.2 U3.12 | length 3.9
  Top Layer w0.3: SW1.2 14.125,17.889 14.961,18.725 15.775,18.725 U3.12
V_Bat: C3.1 C13.1 D1.2 D4.2 D5.2 K1.1 K1.3 K2.1 K2.3 P1.1@101.25,63.7 P1.2@96.45,63.7 Q2.2 Q3.2 U1.2 UVLO1.2 | length 199.3
  Top Layer w0.8: U1.2 22.31,46.285 UVLO1.2 C3.1 22.2,47.775 22.2,49.825 35.8,63.425 87.075,63.425 v3(87.375,63.725)
  Top Layer w2: D1.2 118.6,61.125 C13.1
  Bottom Layer w2: 60.516,19.609 60.516,22.434 K1.3 60.325,22.662 62.966,25.303 65.492,25.303 68.864,28.675 73.1,28.675 ; Q2.2 85.325,61.675 v3(87.375,63.725) ; K2.3 90.275,21.85 90.275,19.35 D5.2 ; P1.1@101.625,63.721 101.625,63.725 101.35,63.725 105.825,59.25 Q3.2
  Bottom Layer w2.5: K1.1 K1.3 ; K2.1 K2.3
  Bottom Layer w5: 83.725,20.375 81.4,20.375 73.1,28.675 73.1,59.6 77.225,63.725 v3(87.375,63.725)
  other v3: 92.175,63.725
V_DET: U3.14
VDD: C5.2 C11.1 J2.6 J3.1 J4.1 R2.2 R3.2 U2.1 U3.9 U5.8 | length 152
  Top Layer w0.2: 43.3,50.425 46.55,50.425 46.878,50.097 46.878,40.903 46.35,40.375 37.675,31.7 37.675,28.425 40.978,25.122 40.978,23.104 42.332,21.75 43.57,21.75 U5.8
  Top Layer w0.5: 7.625,13.678 7.625,13.838 ; 8.15,14.363 8.15,18.482 8.443,18.775 U3.9
  Top Layer w1: R2.2 8.387,14.6 7.625,13.838 7.037,13.25 J3.1 J4.1 3.773,5.302 3.773,3.677 6.795,0.655 43.325,0.655 44.625,1.955 44.625,6.275 44.625,6.742 ; R3.2 27.85,9.05 J2.6 31.5,5.65 43.533,5.65 44.625,6.742 ; U2.1 43.3,50.425 ; U5.8 45.83,21.78 45.85,21.8 46.9,20.75 46.9,13.85 44.602,11.552 44.625,11.53 44.625,6.742
pads on no net: SW1.1 SW1.3 U3.10 U5.5 U5.6 U5.7
copper on no net:
  other v4: 64.925,38.75 123.925,38.85 124.025,50.55 65.325,50.65

## Polygon pours and split planes (outlines as drawn)
GND on Top Layer "NONET_L01_P002" (solid, shelved, pour order 2): 35.1,73.325 -0.1,38.125 -0.2,38.125 -0.2,-0.05 -0.025,-0.225 120.925,-0.225 120.925,-0.15 127.675,6.6 127.675,73.5 60.5,73.5 60.425,73.575

## Keep-outs
Keep-Out Layer:
  the board outline again, w0.254

## Other copper
Top Layer:
  region net NetC4_2: 41.125,55.425 41.125,53.525 41.95,52.7 42.975,52.7 42.975,53.7 43.775,54.5 43.775,55.375 43.725,55.425
  region net NetC8_1: 109.325,13.375 117.95,13.375 118.1,13.525 118.1,22.075 117.85,22.325 109.5,22.325 108.775,21.6 108.775,14.15
  region net NetC12_1: 42.9,25.85 41.3,24.25 41.3,23.175 41.65,22.825 43.875,22.825 43.925,22.875 43.925,25.85
  region net NetR17_1: 33.875,22.575 33.975,22.575 38.75,22.575 39,22.325 39,21.45 38.875,21.325 33.95,21.325 33.875,21.4
  region net NetK1_2: 83.7,37.175 84.625,37.175 86.075,38.625 86.075,42.775 86.1,42.8
  region net V_Bat: 82.85,65.425 82.875,65.4 119.675,65.4 119.675,57.1 82.779,57.1
  region net 15V: 44.325,46.25 44.125,46.05 44.125,45.425 45.9,45.425 46.525,46.05 46.525,48.15 45.975,48.7 44.325,48.7
  region net 15V: 36.225,53.65 38.025,55.45 40.525,55.45 40.525,55.35 40.525,54.45 38.725,52.65 38.725,48.75 39.425,48.05 39.425,44.65 37.825,44.65 36.525,45.95 33.525,45.95 33.525,46.85
  region net B: 25.075,21.757 25.075,20.575 24.3,19.8 23.325,19.8 23.325,18.775 23.35,18.75 26,18.75 26,21.757
  region net F: 22.1,24.725 22.1,23.75 24.575,23.75 25.05,23.275 25.05,22.35 25.975,22.35 26,22.325 26.025,22.35 26.025,24.6 25.85,24.775 22.15,24.775
  region net NetC1_2: 29.775,53.65 27.725,51.6 27.725,50.075 27.725,48.95 29.525,47.15 31.45,47.15 31.45,48.5 32.6,49.65 32.6,53.65
  region net VDD: 41.925,51.8 41.925,50.825 41.275,50.15 41.275,50.125 41.275,49.225 43.75,49.225 43.775,49.25 43.775,50.975 42.95,51.8
Bottom Layer:
  region net V_Bat: 82.754,57.175 84.325,55.604 84.325,53.35 86.25,53.35 87.625,57.175 86.575,57.175
  region net V_Bat: 102.375,57.625 105.65,54.35 106.125,54.35 108.1,56.325 108.1,57.625
  region net V_Bat: 82.825,65.5 82.85,65.475 119.65,65.475 119.65,57.175 82.754,57.175

## Silkscreen, mask and mechanical layers (free items; w line width, h text height)
Top Overlay:
  lines w0.1: 32.875,55.55 32.875,61.375 33.05,61.55 37.825,61.55 37.825,55.65 38.35,55.125 38.35,48.15 37.8,47.6 35.85,47.6 35.225,46.975 ; 35.225,47.575 35.225,46.975 ; 35.7,46.975 35.225,46.975
  lines w0.254: 124.725,34.05 124.725,38.85 124.725,43.65 ; 124.725,47.05 124.725,51.85 ; 124.725,50.55 124.725,55.35
  lines w1.8: 64.225,38.85 124.725,38.85 ; 64.525,50.55 125.025,50.55
  text "Fuse 50A" at 45.479,68.529 h1.52
  text "RF 36V Controller v1.0" at 54.05,5.412 h2.5
  text "Aug 6th 2021" at 53.975,3.512 h2.5
  text "KVZ" at 54.125,1.129 h2.5
Top Solder:
  region: 71.313,70.45 71.388,70.375 71.388,68.45 71.238,68.3 67.463,68.3 67.363,68.4 67.363,70.45 67.563,70.45
  region: 81.538,70.375 81.613,70.3 81.613,68.375 81.463,68.225 77.688,68.225 77.588,68.325 77.588,70.375 77.788,70.375
Bottom Solder:
  lines w2: 85.325,54.35 85.325,61.675 87.225,63.575 ; 88.6,10.05 89.425,10.05
  lines w3: 60.325,22.625 60.325,24.775 63.9,28.35 64.7,29.15 71.175,29.15

## Text inside footprints (layer, text, board x,y; h text height)
J1: Top Overlay "1" at 122.48,34.743 h0.89 r90; Top Overlay "2" at 122.404,31.899 h0.89 r90; Bottom Overlay "1" at 124.106,36.318 h0.89 r90; Bottom Overlay "2" at 124.233,31.137 h0.89 r90
J2: Top Overlay "6" at 33.05,7.075 h0.89 r180; Top Overlay "1" at 17.625,7.075 h0.89 r180
J3: Top Overlay "4" at 4.795,21.267 h0.89 r270; Top Overlay "1" at 4.795,13.332 h0.89 r270; Bottom Overlay "4" at 3.017,22.1 h0.89 r270; Bottom Overlay "1" at 3.169,11.757 h0.89 r270
J4: Top Overlay "5" at 16.882,5.855 h0.89 r180; Top Overlay "1" at 0.803,5.982 h0.89 r180; Bottom Overlay "5" at 14.824,6.058 h0.89 r180; Bottom Overlay "1" at 2.032,5.906 h0.89 r180
K1: Top Overlay "COM" at 76.15,24.8 h0.6; Top Overlay "COM" at 66.4,7.775 h0.6; Top Overlay "Coil" at 63.275,30.6 h0.6; Top Overlay "COM" at 58.075,7.725 h0.6; Top Overlay "NO" at 48.025,22 h0.6; Top Overlay "NC" at 48.075,25.825 h0.6; Top Overlay "Coil" at 59.5,30.55 h0.6
K2: Top Overlay "Coil" at 89.375,29.85 h0.6; Top Overlay "NC" at 77.95,25.125 h0.6; Top Overlay "NO" at 77.9,21.3 h0.6; Top Overlay "COM" at 87.95,7.025 h0.6; Top Overlay "Coil" at 93.15,29.9 h0.6; Top Overlay "COM" at 96.275,7.075 h0.6; Top Overlay "COM" at 106.025,24.1 h0.6